# Altium PCB ESP32-PicoDK - new.PcbDoc
Units mil, origin at the board's own origin, x right, y up, seen from the top; angles counter-clockwise.
Board outline 2080 x 1506 mil, 2 copper layers (Top1, Bottom2), stack 40.202 mil thick; 47 components, 68 nets, 274 pads, 137 vias.
Unrouted connection lines stored in the file: 1.
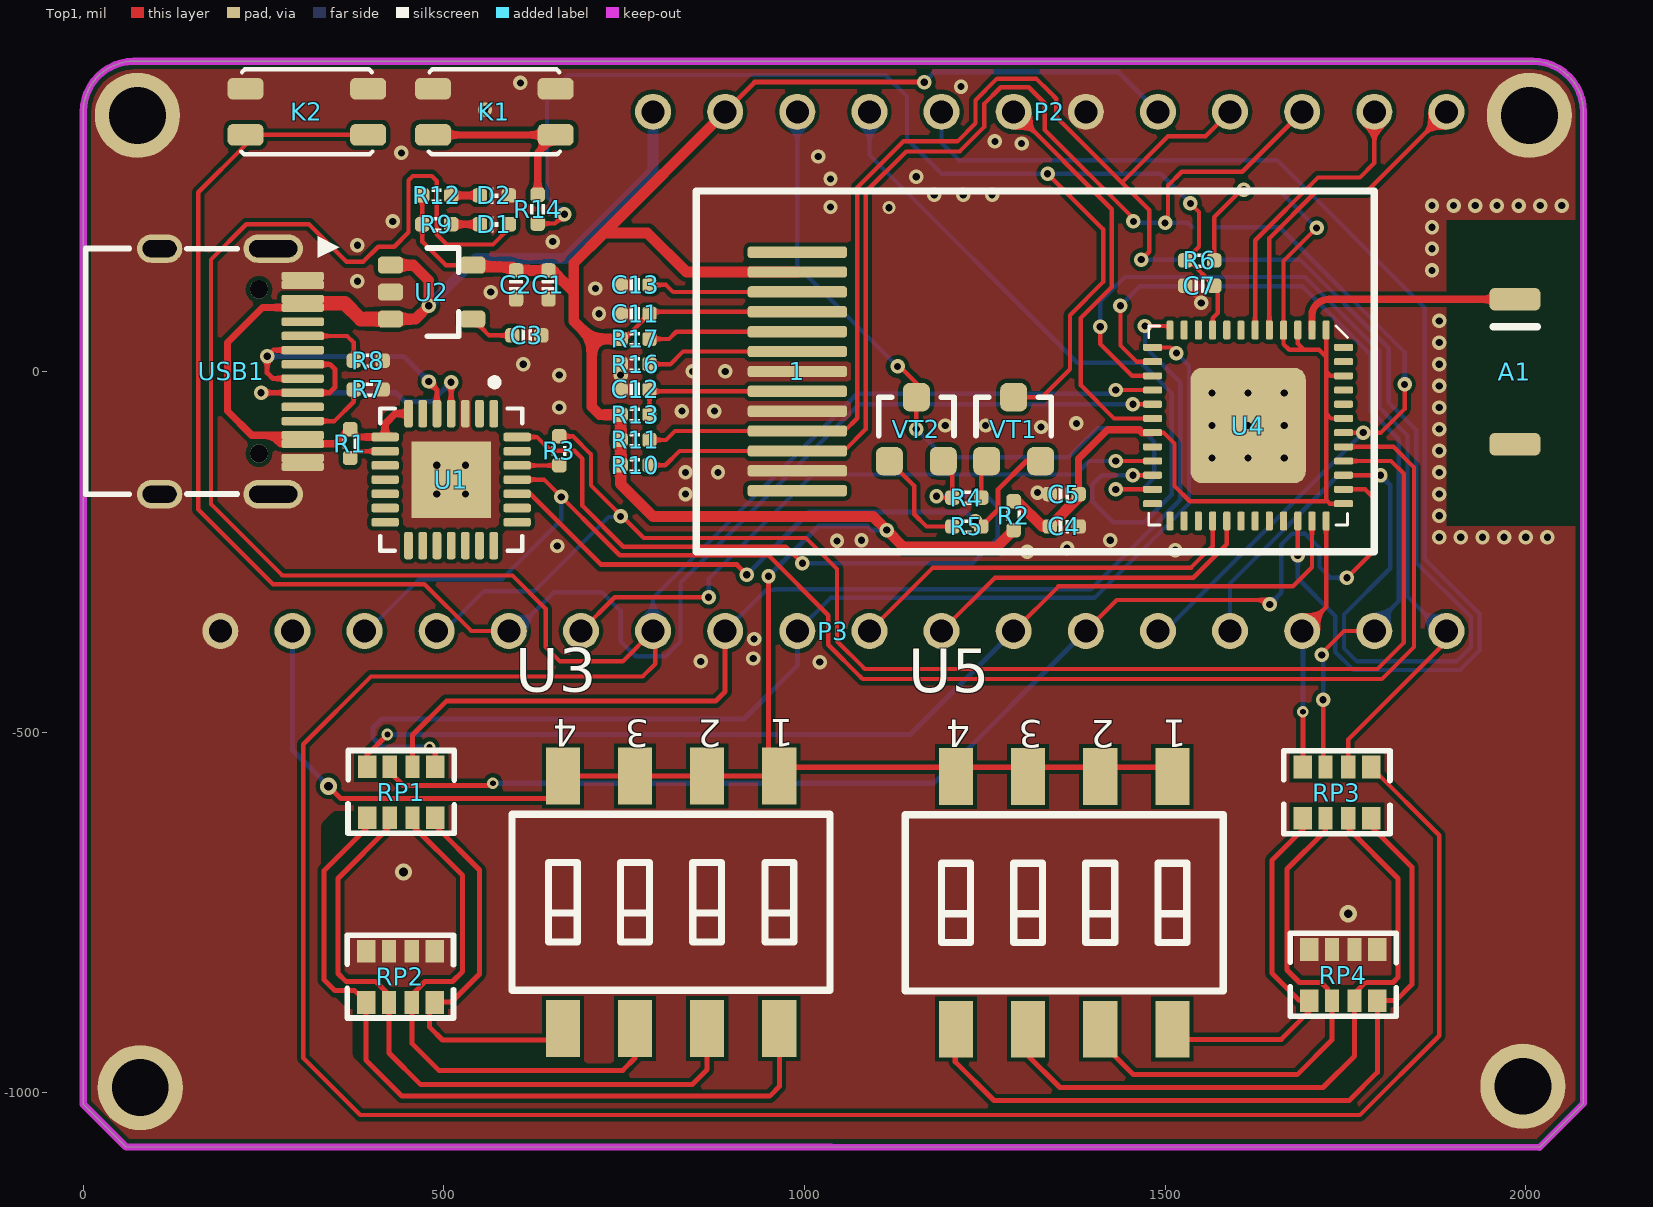
[diagram p0: Top1 view]
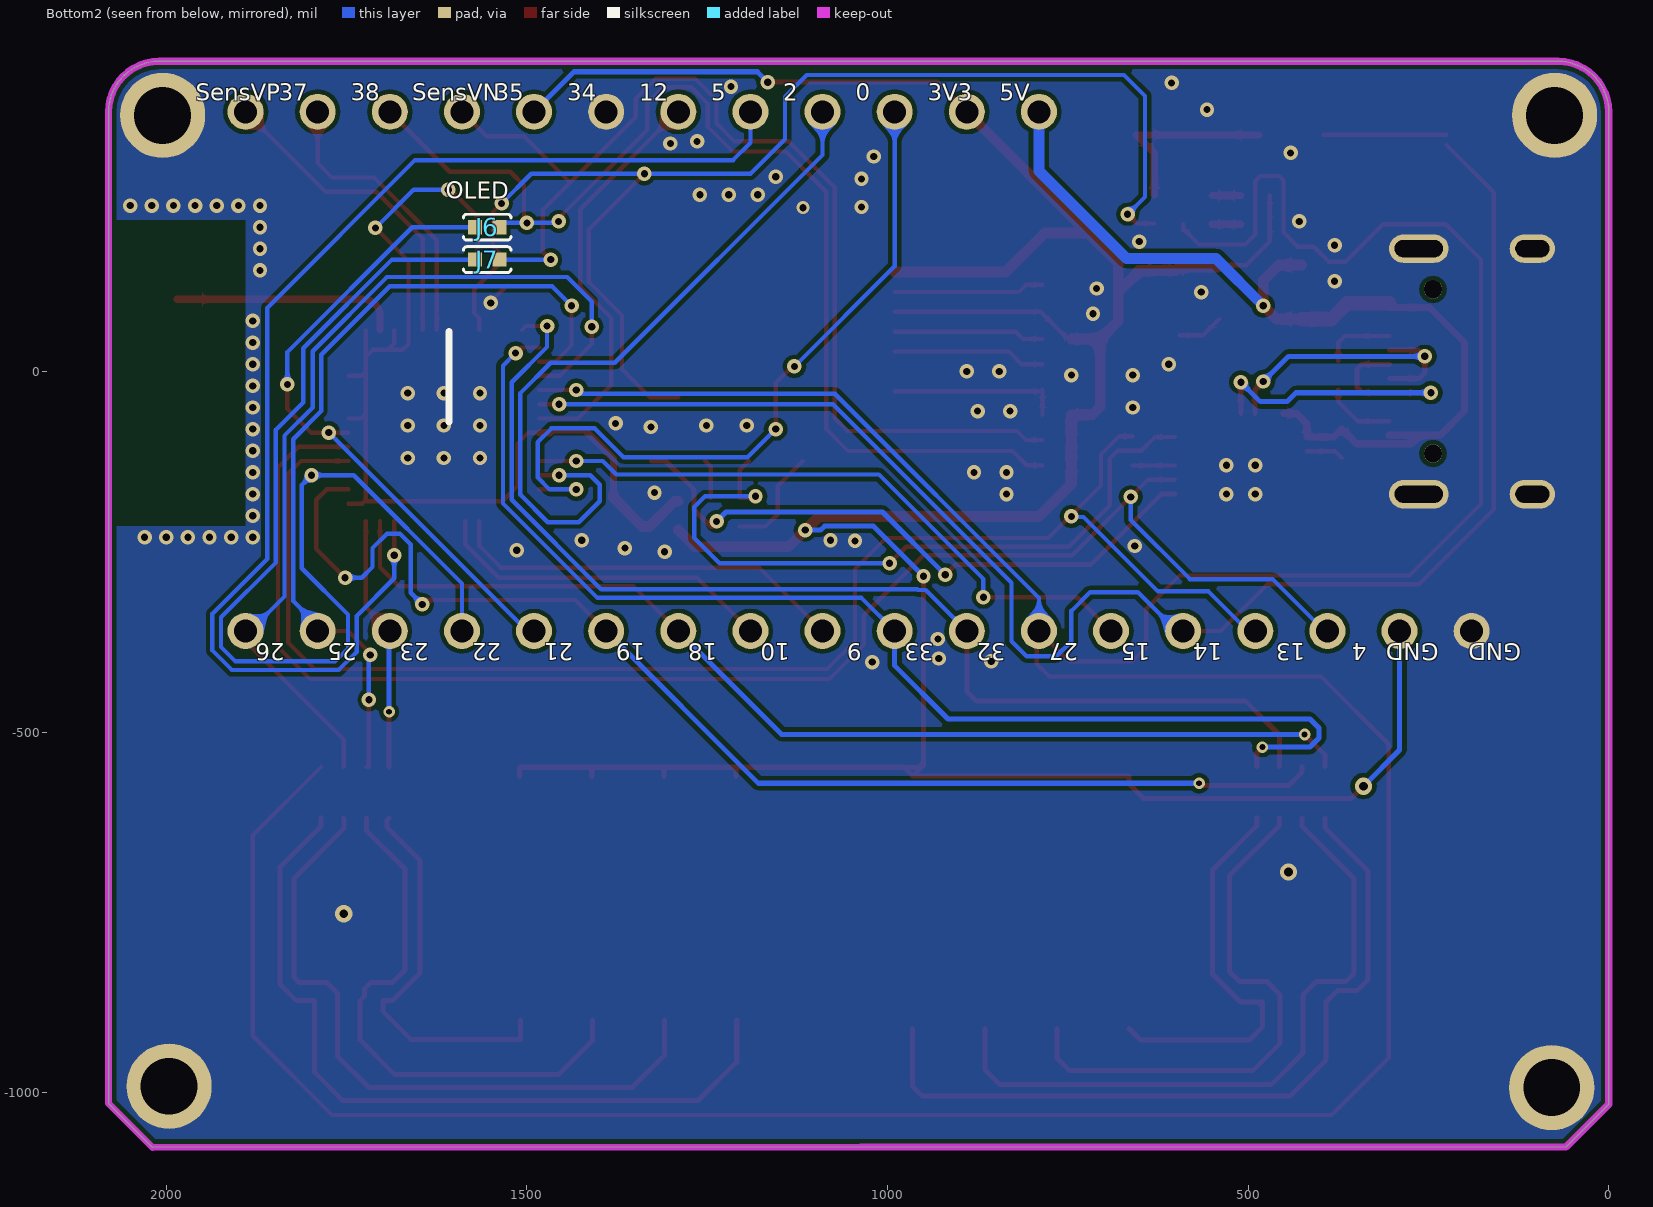
[diagram p1: Bottom2 view, seen from below]
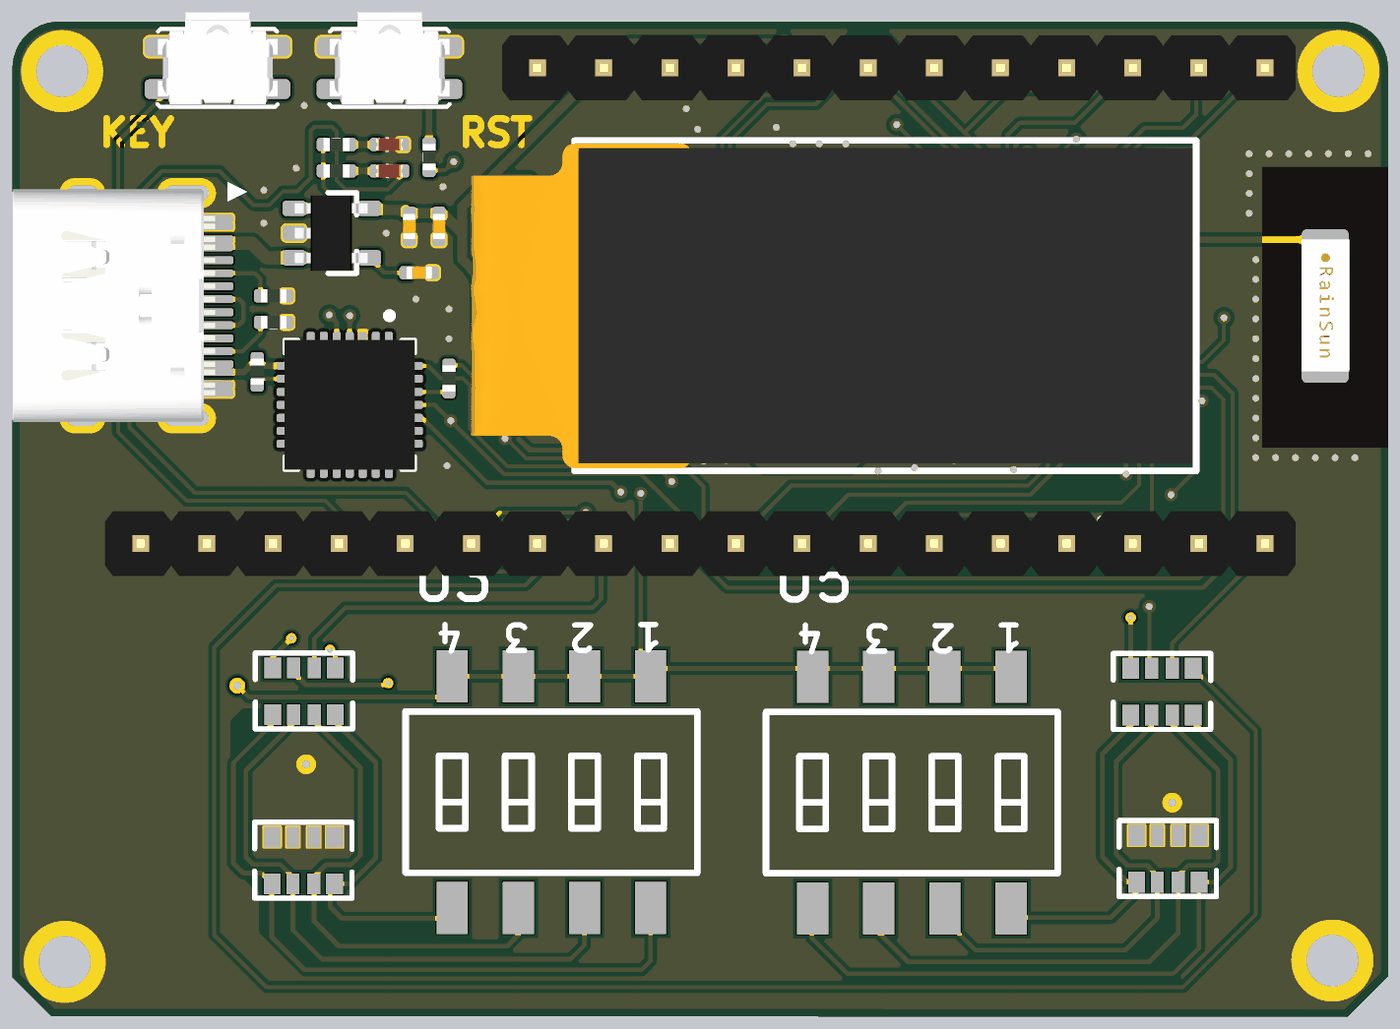
[diagram p2: 3D render of the assembled board from above, using the file's embedded part models]

## Layer stack, top to bottom
Top Solder: solder mask 0.4, Solder Resist, Dk 3.5
Top1: signal copper 1.4
Dielectric 1: core 37.4016, FR-4, Dk 4.2
Bottom2: signal copper 1.4
Bottom Solder: solder mask 0.4, Solder Resist, Dk 3.5

## Board outline
0,-1016 59,-1075 2019,-1076 2080,-1015 2080,360 ccw(c2010,360) 2010,430 70,430 ccw(c70,360) 0,360

## Design rules (kind name [scope] priority, off if disabled: settings)
Clearance [All] p1: gap=6 ignorepadtopadclearanceinfootprint=FALSE
ComponentClearance [All] p1: gap=0 collisioncheckmode=3 verticalgap=0 showdistances=FALSE
DiffPairsRouting [All] p1: maxlimit=9 minlimit=9 mostfreqgap=9 toplayer_minwidth=4 toplayer_maxwidth=4 toplayer_prefwidth=4 bottomlayer_minwidth=4 bottomlayer_maxwidth=4 bottomlayer_prefwidth=4 maxuncoupledlength=500
FanoutControl Fanout_BGA [All] p1: bgadir=Out bgaviamode=Centered fanoutstyle=Auto fanoutdirection=Alternating viagrid=1 // Fanout_BGA (Default Rule)
HoleSize [All] p1: absolutevalues=TRUE maxlimit=10000 minlimit=8 maxpercent=80.000 minpercent=20.000
MinimumSolderMaskSliver [All] p1 off: minsoldermaskwidth=2
PlaneClearance [All] p1: clearance=8
PlaneConnect [All] p1: planeconnectstyle=Direct reliefexpansion=20 reliefentries=4 reliefconductorwidth=10 reliefairgap=10
PolygonConnect [All] p1: connectstyle=Direct reliefconductorwidth=10 reliefentries=4 polygonreliefangle="90 Angle" airgapwidth=10
RoutingVias [All] p1: holewidth=8 width=16 viastyle="Through Hole" minholewidth=6 minwidth=12 maxholewidth=28 maxwidth=50
SilkToBoardRegionClearance [All] p1 off:
SilkToSilkClearance [All] p1: silktosilkclearance=0
SilkToSolderMaskClearance [IsPad] p1: minsilkscreentomaskgap=0 clearancetoexposedcopper=TRUE
SolderMaskExpansion [All] p1: expansion=3
Width [All] p1: maxlimit=10000 minlimit=6 preferedwidth=7
20 further rules are at their usual default settings.

## Components (designator, comment, footprint, x,y, rotation, side; value= is the part's Value field where it differs from the comment)
1 "OLED-12880" OLED-12880 990,0 r180 top locked
A1 "RAINSUN" ANT-Rainsun-AN5120 1985,0 r270 top
C1 "0.1uF" CAP_0402 645,120 r90 top value=0.1u
C2 "10uF" CAP_0402 600,120 r90 top value=0.1u
C3 "10nF" CAP_0402 615,50 r180 top value=0.1u
C4 "10uF" CAP_0402 1360,-215 r180 top value=0.1u
C5 "0.1uF" CAP_0402 1360,-170 r0 top value=0.1u
C7 "0.1uF" CAP_0402 1548,118.89 r180 top value=0.1u
C11 "10uF" CAP_0402 765,80 r0 top value=0.1u
C12 "10uF" CAP_0402 765,-25 r0 top value=0.1u
C13 "10uF" CAP_0402 765,120 r0 top value=0.1u
D1 "color?" LED_0402_RED 570,204 r0 top
D2 "color?" LED_0402_RED 570,244 r0 top
J6 "跳线" 0402-0R 1555,200 r0 bottom
J7 "跳线" 0402-0R 1555,155 r0 bottom
K1 "TACT 4P" ButtonTACT_3.5*3.55_90 570,360 r0 top value=3.4x3.5
K2 "TACT 4P" ButtonTACT_3.5*3.55_90 310,360 r0 top value=3.4x3.5
P2 "HDR1x12_2.54" HDR1X12_2.54_180 1890,360 r270 top locked
P3 "HDR1x18_2.54" HDR1X18_2.54_180 1890,-360 r270 top
R1 "10K" RES_0402 370,-100 r270 top value=22R
R2 "0R" RES_0402 1290,-200 r90 top value=22R
R3 "200R" RES_0402 660,-110 r270 top value=22R
R4 "12K" RES_0402 1225,-175 r0 top value=22R
R5 "12K" RES_0402 1225,-215 r180 top value=22R
R6 "10K" RES_0402 1548,153.89 r180 top value=22R
R7 "5.1K" RES_0402 395,-25 r0 top value=22R
R8 "5.1K" RES_0402 395,15 r0 top value=22R
R9 "1K" RES_0402 490,204 r0 top value=22R
R10 "10K" RES_0402 765,-130 r180 top value=22R
R11 "10K" RES_0402 765,-95 r180 top value=22R
R12 "1K" RES_0402 490,244 r0 top value=22R
R13 "10K" RES_0402 765,-60 r180 top value=22R
R14 "1K" RES_0402 630,225 r270 top value=22R
R16 "560K" RES_0402 765,10 r180 top value=22R
R17 "4.7K" RES_0402 765,45 r180 top value=22R
RP1 "4D03WGJ0102T5E" RES-ARRAY-SMD_0603-8P-L3.2-W1.6-BL 440.75,-583.43 r0 top
RP2 "YC164-JR-075K1L" RES-ARRAY-SMD_0603-8P-L3.2-W1.6-BL 439.75,-839.43 r0 top
RP3 "4D03WGJ0102T5E" RES-ARRAY-SMD_0603-8P-L3.2-W1.6-BL 1738.24,-584 r0 top
RP4 "YC164-JR-075K1L" RES-ARRAY-SMD_0603-8P-L3.2-W1.6-BL 1747,-837 r0 top
U1 "CP2102" QFN-28 510,-150 r270 top value=Value
U2 "LP2992 3V3" SOT23-5 485,110 r0 top
U3 "DM-04-V" SW-SMD_8P-L11.1-W6.2-P2.54-LS9.8 815,-736 r180 top
U4 "ESP32_SIP" QFN-48_7X7 1615,-75 r270 top
U5 "DM-04-V" SW-SMD_8P-L11.1-W6.2-P2.54-LS9.8 1360,-736.81 r180 top
USB1 "Type-C" Type-C-TOP 205,0 r180 top locked
VT1 "S8050" SMT_TRIODE_NPN 1290,-80 r0 top
VT2 "S8050" SMT_TRIODE_NPN 1155,-80 r0 top

## Footprints (in the part's own frame and the unit in brackets; to place one, negate y for a bottom-side part, rotate by r counter-clockwise, add the part's x,y. Pads: shape width x height; smd on the part's side, far side on the other; paste and mask are expansions set on the pad)
0402-0R [mm] "选择焊盘"
  rect 0.5x0.5 smd: 1(-0.432,0) 2(0.432,0)
  silkscreen extent -0.84,-0.46 0.84,0.46
ANT-Rainsun-AN5120 [mm] "选择焊盘"
  rrect50% 0.8x1.8 smd: 1(-2.54,0) ""(2.563,0)
  silkscreen extent -1.57,-0.76 -1.57,0.79, body extent -2.57,-0.91 2.54,0.94, height 1.32
ButtonTACT_3.5*3.55_90 [mil]
  rrect50% 50x30 smd: 1(-85,32) 2(-85,-32) 3(85,32) 4(85,-32)
  silkscreen extent -91,-59 91,59, body extent -90,-55 91,85, height 56
CAP_0402 [mil]
  rrect50% 20x20 smd: 1(-20,0) 2(20,0)
  silkscreen extent -7,-9 7,9, body extent -20,-10 20,10, height 20
HDR1X12_2.54_180 [mil]
  round 50 hole 32: 1(0,0) 2(0,-100) 3(0,-200) 4(0,-300) 5(0,-400) 6(0,-500) 7(0,-600) 8(0,-700) 9(0,-800) 10(0,-900) 11(0,-1000) 12(0,-1100)
  body extent -49,-1150 49,50, height 323
HDR1X18_2.54_180 [mil]
  round 50 hole 32: 1(0,0) 2(0,-100) 3(0,-200) 4(0,-300) 5(0,-400) 6(0,-500) 7(0,-600) 8(0,-700) 9(0,-800) 10(0,-900) 11(0,-1000) 12(0,-1100) 13(0,-1200) 14(0,-1300) 15(0,-1400) 16(0,-1500) 17(0,-1600) 18(0,-1700)
  body extent -49,-1750 49,50, height 323
LED_0402_RED [mil]
  rrect50% 20x20 smd: 1(-20,0) 2(20,0)
  silkscreen extent -6,-11 6,10, body extent -20,-10 20,10, height 18
OLED-12880 [mm]
  rrect50% 3.5x0.4 smd: 1(0,-4.2) 2(0,-3.5) 3(0,-2.8) 4(0,-2.1) 5(0,-1.4) 6(0,-0.7) 7(0,0) 8(0,0.7) 9(0,1.4) 10(0,2.1) 11(0,2.8) 12(0,3.5) 13(0,4.2)
  silkscreen extent -20.32,-6.35 3.56,6.35, body extent -20.18,-6.25 7.54,6.25, height 1.55
QFN-28 [mil]
  rrect50% 38x12 smd mask+5: 1(-91.5,59.05) 2(-91.5,39.37) 3(-91.5,19.68) 4(-91.5,0) 5(-91.5,-19.69) 6(-91.5,-39.37) 7(-91.5,-59.06) 15(91.5,-59.06) 16(91.5,-39.37) 17(91.5,-19.69) 18(91.5,0) 19(91.5,19.68) 20(91.5,39.37) 21(91.5,59.05)
  rrect50% 12x38 smd mask+5: 8(-59.06,-91.5) 9(-39.37,-91.5) 10(-19.69,-91.5) 11(0,-91.5) 12(19.68,-91.5) 13(39.37,-91.5) 14(59.05,-91.5) 22(59.05,91.5) 23(39.37,91.5) 24(19.68,91.5) 25(0,91.5) 26(-19.69,91.5) 27(-39.37,91.5) 28(-59.06,91.5)
  rect 106.3x110.24 smd: 29(0,0)
  silkscreen extent -140,-98 99,99, body extent -99,-99 98,98, height 35
QFN-48_7X7 [mm]
  rrect50% 0.675x0.25 smd: 1(-3.362,2.75) 2(-3.362,2.25) 3(-3.362,1.75) 4(-3.362,1.25) 5(-3.362,0.75) 6(-3.362,0.25) 7(-3.362,-0.25) 8(-3.362,-0.75) 9(-3.362,-1.25) 10(-3.362,-1.75) 11(-3.362,-2.25) 12(-3.362,-2.75) 25(3.363,-2.75) 26(3.363,-2.25) 27(3.363,-1.75) 28(3.363,-1.25) 29(3.363,-0.75) 30(3.363,-0.25) 31(3.363,0.25) 32(3.363,0.75) 33(3.363,1.25) 34(3.363,1.75) 35(3.363,2.25) 36(3.363,2.75)
  rrect50% 0.25x0.675 smd: 13(-2.75,-3.362) 14(-2.25,-3.362) 15(-1.75,-3.362) 16(-1.25,-3.362) 17(-0.75,-3.362) 18(-0.25,-3.362) 19(0.25,-3.362) 20(0.75,-3.362) 21(1.25,-3.362) 22(1.75,-3.362) 23(2.25,-3.362) 24(2.75,-3.362) 37(2.75,3.363) 38(2.25,3.363) 39(1.75,3.363) 40(1.25,3.363) 41(0.75,3.363) 42(0.25,3.363) 43(-0.25,3.363) 44(-0.75,3.363) 45(-1.25,3.363) 46(-1.75,3.363) 47(-2.25,3.363) 48(-2.75,3.363)
  rrect20% 4.064x4.064 smd: 49(0,0)
  silkscreen extent -3.5,-3.5 3.5,3.5, body extent -3.5,-3.5 3.5,3.5, height 1
RES-ARRAY-SMD_0603-8P-L3.2-W1.6-BL [mm]
  rect 0.65x0.8 smd paste+0 mask+0.051: 1(-1.2,-0.9) 4(1.2,-0.9) 5(1.2,0.9) 8(-1.2,0.9)
  rect 0.5x0.8 smd paste+0 mask+0.051: 2(-0.4,-0.9) 3(0.4,-0.9) 6(0.4,0.9) 7(-0.4,0.9)
  silkscreen extent -1.87,-1.45 1.87,1.47
RES_0402 [mil]
  rrect50% 20x20 smd: 1(-20,0) 2(20,0)
  silkscreen extent -7,-10 7,10, body extent -20,-10 20,10, height 14
SMT_TRIODE_NPN [mm] "Surface mount NPN transistor, package SOT-23"
  rrect50% 0.95x1 smd: 1(-0.95,-1.125) 2(0.95,-1.125) 3(0,1.125)
  silkscreen extent -1.33,-0.23 1.32,1.12, body extent -1.45,-1.4 1.45,1.4, height 1.3
SOT23-5 [mm] "SOT23, 3-Leads, Body 3.1x3.0mm (max), Pitch 0.95mm, IPC Medium Density"
  rrect50% 0.889x0.6 smd: 1(-1.5,0.95) 2(-1.5,0) 3(-1.5,-0.95) 4(1.396,-0.95) 5(1.396,0.95)
  silkscreen extent -0.2,-1.55 0.9,1.55, body extent -1.48,-1.45 1.32,1.45, height 1.2
SW-SMD_8P-L11.1-W6.2-P2.54-LS9.8 [mm]
  rect 1.2x2 smd paste+0 mask+0.051: 1(-3.81,-4.45) 2(-1.27,-4.45) 3(1.27,-4.45) 4(3.81,-4.45) 5(3.81,4.45) 6(1.27,4.45) 7(-1.27,4.45) 8(-3.81,4.45)
  silkscreen extent -5.6,-3.1 5.6,3.1
Type-C-TOP [mm]
  round 0.65 hole 0.65: 0(-0.98,2.89) 0(-0.98,-2.89)
  oval 1.6x1 hole 0.6 slot 1.2 at 0 deg: 1(2.52,4.325) 2(2.52,-4.325)
  oval 2.1x1 hole 0.6 slot 1.7 at 0 deg: 3(-1.48,-4.325) 4(-1.48,4.325)
  rrect50% 1.5x0.3 smd: A1(-2.52,-3.35) A4(-2.52,-2.55) A5(-2.52,-1.25) A6(-2.52,-0.25) A7(-2.52,0.25) A8(-2.52,1.25) A9(-2.52,2.55) A12(-2.52,3.35) B1(-2.52,3.05) B4(-2.52,2.25) B5(-2.52,1.75) B6(-2.52,0.75) B7(-2.52,-0.75) B8(-2.52,-1.75) B9(-2.52,-2.25) B12(-2.52,-3.05)
  silkscreen extent -0.22,-4.32 5.12,4.32, body extent -2.57,-4.48 5.18,4.48, height 3.26

## Part data
A1: library part ANT-Rainsun-AP5120
C1 C2 C3 C4 C5 C7 C11 C12 C13: library part 电容-0402, "Capacitor"
D1 D2: library part LED_0402, "LED", Type=0402
J6 J7: "Resistor", LatestRevisionDate=17-Jul-2002, LatestRevisionNote="Re-released for DXP Platform.", PackageDescription="Axial Device, Thru-Hole; 2 Leads; 0.4 in Pin Spacing", PackageReference=AXIAL-0.4, Published=8-Jun-2000, Publisher="Altium Limited"
K1 K2: library part ButtonTACT, "Button", Type="TACT 4P"
P2 P3: "Header"
R1 R2 R3 R4 R5 R6 R7 R8 R9 R10 R11 R12 R13 R14 R16 R17: library part 电阻-0402, "Resistor"
RP1 RP2 RP3 RP4: library part RP
U1: "USBתTTL", MFG #1="SILICON LABS", PART DESC="SINGLE-CHIP USB TO UART BRIDGE, QFN28, RoHS.", PART NUMBER=CP2102, RefDes=RefDes, Type=DEV
U2: library part LP2992, "LDO"
U3 U5: library part "SW DIP-4", "DIP Switch, 4 Position, SPST", Code_IPC=SOIC127P600-8, Code_JEDEC=MS-012-AA, LatestRevisionDate=29-May-2009, LatestRevisionNote="IPC-7351 Footprint Added.", PackageDescription="8-Pin Small Outline Integrated Circuit 1.27 mm Pitch", PackageReference=SO8, PackageVersion=Dec-2002, Published=24-Mar-1999, Publisher="Altium Limited"
U4: library part ESP32-PICO
USB1: library part USB-Type-C-TOP
VT1 VT2: library part SMT_TRIODE_NPN, "Surface mount NPN transistor, package SOT-23"

## Free pads (board coordinates)
  round 118.11 hole 78.74: ""(75,355) ""(79,-993) ""(1996,-991) ""(2005,355)

## Via types
v1: diameter 20, hole 10, Top1 to Bottom2, tented both sides, 129 vias
v2: diameter 16, hole 8, Top1 to Bottom2, 4 vias
v3: diameter 24, hole 12, Top1 to Bottom2, 3 vias
v4: diameter 18, hole 10, Top1 to Bottom2, tented both sides, 1 vias

## Nets (pads, with @x,y where several pads share a name; then routed paths per layer and width w, separated by ;. In a path a pad name is that pad's centre, name@x,y a point inside that pad or via, vN(x,y) a via of type N, cw(c..) or ccw(c..) an arc to the next point about the centre after c; other vN are vias at no path point)
3V3A: C4.2 C5.2 R2.2 R6.1 U4.1 U4.3 U4.4 U4.19 U4.37 U4.43 U4.46 | length 1444.1
  Top1 w6: U4.19 1497.84,-84.84 1513,-100 1513,-159 1534,-180 1721.53,-180 1723.27,-178.27 ; R6.1 1568,214 1606,252 v1(1609,252) ; U4.3 1683.9,38.74 1692.63,30 ; v1(1710,199) 1664.21,153.21 U4.4 1664.21,37.79 1672,30 1692.63,30 ; U4.1 1723.27,20 ; U4.37 1728.27,-183.27 1723.27,-178.27 ; U4.43 1730.16,-65.16 1723.27,-58.27 ; U4.46 1729.1,-6.1 1723.27,-0.27 ; 1692.63,30 1713.27,30 1723.27,20 ; 1723.27,-178.27 1723.27,-58.27 ; 1723.27,-58.27 1723.27,-0.27 ; 1723.27,-0.27 1723.27,20
  Top1 w7: C4.2@1335,-215 C4.2
  Top1 w10: C5.2 1380,-121 1420,-81 1464,-81 1468,-85 1482.46,-85 U4.19
  Top1 w15: R2.2 1295,-180 1330,-215 C4.2@1335,-215 ; C4.2 1380,-175 C5.2
  Bottom2 w6: v1(1609,252) 1657,252 v1(1710,199)
CP_Rx: P3.16 U1.25 U4.41 | length 2127.6
  Top1 w6: U1.25 638.68,-150 743.68,-255 950,-255 1033,-338 1033,-379 1077.5,-423.5 1077.5,-423.87 1077.87,-423.87 1080.5,-426.5 1800.5,-426.5 1845,-382 1845,-133 1816.53,-104.53 U4.41
  Bottom2 w6: P3.16 394,-360 466,-288 580.73,-288 662.68,-206.06 v1(662.68,-174)
CP_Tx: P3.15 R3.1 U4.40 | length 2049.3
  Top1 w6: R3.1 679,-90 704,-115 704,-158 777,-231 1002,-231 1045,-274 1045,-374.03 1080.98,-410.01 1083.47,-412.5 1794.5,-412.5 1831,-376 1831,-142 1813.21,-124.21 U4.40
  Bottom2 w6: P3.15 491.55,-358.45 501.55,-358.45 555,-305 625,-305 728.13,-201.87 744.13,-201.87 v1(745,-201)
DTR: R4.1 U1.28 VT2.2 | length 1004.8
  Top1 w6: U1.28 628.94,-90.94 648,-110 681,-110 692,-121 692,-186.35 748.65,-243 974,-243 v1(997,-266) ; v1(1183,-173) 1185,-175 R4.1 1205,-136.89 VT2.2
  Bottom2 w6: v1(997,-266) 1233,-266 1268,-231 1268,-188 1253,-173 v1(1183,-173)
EN: C7.1 R6.2 R14.2 U4.9 VT1.3 | length 1857.6
  Top1 w6: R14.2 654,205 v1(667,218) ; VT1.3 1329.29,-35.71 1368,3 1368,78 1414,124 1414,197 v1(1337,274) ; v1(1535,233) 1547,221 1547,172.89 R6.2 1533,153.89 C7.1 1573,113.89 1573,81 1565.79,73.79 U4.9
  Bottom2 w6: v1(667,218) 643,242 643,382 672,411 1112,411 1142,381 1142,322 1190,274 v1(1337,274) 1494,274 v1(1535,233)
FLASH_CLK: U4.31
FLASH_CS: U4.25
FLASH_SD0: U4.27
FLASH_SD1: U4.33
FLASH_SD2: U4.30
FLASH_SD3: U4.32
GND: 1.7 1.9 1.12 C1.1 C2.1 C3.1 C4.1 C5.1 C7.2 C11.1 C12.1 C13.1 D2.2 K1.1 K1.3 K2.1 K2.3 P2.6 P3.18 pad. R7.2 R8.2 R16.2 RP2.5 RP2.6 RP2.7 RP2.8 RP4.5 RP4.6 RP4.7 RP4.8 U1.3 U1.29 U2.2 U4.49 USB1.1 USB1.2 USB1.3 USB1.4 USB1.A1 USB1.A12 USB1.B1 USB1.B12 | length 33
  Top1 w6: C7.2 1550,96.89 v1(1550,95)
  other v1: 1021,-403 856,-402 929,-398 930,-371 1309,-250 1514,-248 1364,-245 657,-242 1045,-235 1079,-234 1424,-234 1880,-230 1910,-230 1940,-230 1970,-230 2000,-230 2030,-230 1880,-200 490,-170 530,-170 835,-170 1880,-170 1323,-168 835,-140 880,-140 1880,-140 490,-130 530,-130 1565,-120 1615,-120 1665,-120 1880,-110 1880,-80 1328,-77 1195,-75 1251,-75 1565,-75 1615,-75 1665,-75 1377,-72 830,-55 875,-55 660,-50 1880,-50 1565,-30 1615,-30 1665,-30 1880,-20 660,-5 745,-5 845,0 890,0 610,10 1880,10 1880,40 1880,70 715,80 565,110 710,115 380,125 1870,140 1870,170 380,175 651,180 1870,200 429,208 1036,228 1870,230 1900,230 1930,230 1960,230 1990,230 2020,230 2050,230 1180,245 1220,245 1260,245 1036,267 1155,270 1019,298 441,303 1301,316 1264,319 557,363 1217,395 606,400
  other v3: 1753.75,-752 444,-694
  other v4: 1117,227
GPIO0: P2.10 U4.23 VT2.3 | length 1041.3
  Top1 w6: v1(1129,7) 1132,7 1155,-16 VT2.3 v1(1155,-80) ; v1(1431.42,-163.58) U4.23
  Bottom2 w6: P2.10 990,146 v1(1129,7) ; v1(1155,-80) 1194,-119 1366,-119 1406,-79 1466,-79 1485,-98 1485,-147 1468.42,-163.58 v1(1431.42,-163.58)
GPIO2: P2.9 U4.22 | length 1006.5
  Top1 w6: v1(1455.27,-143.9) U4.22
  Bottom2 w6: P2.9 1090,300 1378,12 1466.97,12 1509,-30.03 1509,-171 1471,-209 1428,-209 1399,-180 1399,-157 1412.1,-143.9 v1(1455.27,-143.9)
GPIO4: U4.24
GPIO5: P2.8 U4.34 | length 1739
  Top1 w6: v1(1683.9,-254.9) U4.34
  Bottom2 w6: P2.8 1190,317 1214,293 1655,293 1860,88 1860,-260 1936,-336 1936,-386.97 1908.97,-414 1761.03,-414 1736,-388.97 1736,-339 1683.9,-286.9 v1(1683.9,-254.9)
GPIO9: P3.9 U4.28 | length 559.4
  Top1 w6: P3.9 1178,-272 1536.03,-272 1565.79,-242.24 U4.28
GPIO10: P3.8 U4.29 | length 477.5
  Top1 w6: P3.8 1264,-286 1539,-286 1585.47,-239.53 U4.29
GPIO12: P2.7 U4.18 | length 572.5
  Top1 w6: P2.7 1291,360 1426,225 1426,117 1383,74 1383,-19 1429.16,-65.16 U4.18
GPIO13: U4.20
GPIO14: K2.2 K2.4 P3.14 U4.17 | length 2371.7
  Top1 w6: K2.2@225,314 159.48,248.48 159.48,-191.48 263,-295 473.09,-295 538.08,-360 P3.14 ; K2.2 K2.4 ; v1(1455.27,-45.47) U4.17
  Bottom2 w6: P3.14 599,-360 653,-306 718.97,-306 745,-332.03 745,-374 766,-395 807.06,-395 828,-374.06 828,-292.94 1075.47,-45.47 v1(1455.27,-45.47)
GPIO15: P3.13 U4.21 | length 905
  Top1 w6: P3.13 737,-313 v1(867,-313) ; v1(1431.42,-124.21) U4.21
  Bottom2 w6: v1(867,-313) 867,-287.88 1011.88,-143 1375.94,-143 1394.73,-124.21 v1(1431.42,-124.21)
GPIO18: P3.7 RP1.8 U4.35 | length 1498.3
  Top1 w6: P3.7 1352,-298 1677,-298 1703.58,-271.42 U4.35
  Top1 w7: RP1.8 393.51,-531.5 v2(421.63,-503.38)
  Bottom2 w7: v2(421.63,-503.38) 1146.62,-503.38 P3.7
GPIO19: P3.6 RP1.7 U4.38 | length 1746.6
  Top1 w6: P3.6 1433,-317 1639,-317 v1(1645,-323) ; U4.38 1777.58,-163.58 1792,-178 1792,-246 v1(1752,-286)
  Top1 w7: RP1.7 425,-555.53 443.47,-574 565,-574 v2(568,-571)
  Bottom2 w6: v1(1645,-323) 1661,-307 1661,-239.97 1675.97,-225 1694,-225 1714,-245 1714,-271 1729,-286 v1(1752,-286)
  Bottom2 w7: v2(568,-571) 1151.24,-571 1179,-571 P3.6
GPIO21: J6.2 P3.5 U4.42 | length 907.6
  Top1 w6: U4.42 v1(1774.73,-84.84) 1799.16,-84.84 1832,-52 v1(1832,-18)
  Bottom2 w6: P3.5 1499.58,-360 v1(1774.73,-84.84) ; J6.2 1659,200 1832,27 v1(1832,-18)
GPIO22: J7.2 P3.4 U4.39 | length 1602.1
  Top1 w6: U4.39 v1(1798.58,-143.9)
  Bottom2 w6: J7.2 1687.03,155 1810,32.03 1810,-43 1848,-81 1848,-264.97 1924,-340.97 1924,-382 1904,-402 1766,-402 1748,-384 1748,-337 1812,-273 1812,-157.35 v1@1798.58,-143.93 ; P3.4 1590,-294 1740.1,-143.9 v1(1798.58,-143.9)
GPIO23: P3.3 RP3.8 U4.36 | length 355.4
  Top1 w6: P3.3 1723.27,-326.73 U4.36
  Top1 w7: RP3.8 v2(1691,-472)
  Bottom2 w7: P3.3 1691,-361 v2(1691,-472)
GPIO25: P3.2 RP3.7 U4.14 | length 1166.9
  Top1 w6: v1(1438,91) 1438,35.91 1460.33,13.58 U4.14 ; v1@1715.98,-391.98 1747.97,-360 P3.2 ; v1(1719,-455.31) 1719,-548.56 RP3.7
  Bottom2 w6: v1(1438,91) 1465,118 1690.09,118 1785,23.09 1785,-54.97 1824,-93.97 1824,-318.33 1790,-352.33 P3.2 ; v1(1717,-393) 1719,-395 v1(1719,-455.31)
GPIO26: P3.1 RP3.6 U4.15 | length 1268.7
  Top1 w6: v1(1410.03,62.03) 1410,38 1454.1,-6.1 U4.15 ; RP3.6@1753.75,-548.56 1753.75,-510.25 1890,-374 P3.1
  Bottom2 w6: v1(1410.03,62.03) 1410,97 1444,131 1694.06,131 1797,28.06 1797,-50 1836,-89 1836,-312 1884,-360 P3.1
GPIO27: D1.2 P3.12 RP3.5 U4.16 | length 5673.7
  Top1 w6: D1.2 590,198 568,176 504,176 490,190 490,264 483,271 457,271 451,265 451,193 431,173 409,173 388,152 365,152 313,204 226,204 177,155 177,-184 276,-283 595,-283 641,-329 641,-382 661,-402 748,-402 P3.12 793,-363 793,-405.48 775.48,-423 399,-423 305,-517 305,-952 384,-1031 1770,-1031 1880,-921 1880,-643.08 RP3.5 ; v1(1431.42,-25.79) U4.16
  Bottom2 w6: P3.12 790,-313.97 1072.97,-31 1426.2,-31 v1(1431.42,-25.79)
GPIO32: P3.11 RP1.6 U4.12 | length 1591
  Top1 w6: v1(1472,63) 1501.11,63 U4.12
  Top1 w7: RP1.6 456.5,-504.01 503.37,-457.13 876.63,-457.13 890,-443.76 P3.11
  Bottom2 w6: P3.11 947,-303 957.87,-303 958.87,-302 1397.03,-302 1521,-178.03 1521,-15.03 1472,33.97 v1(1472,63)
GPIO33: P3.10 RP1.5 U4.13 | length 1668.4
  Top1 w6: U4.13 1507.73,33.27 v1(1515.58,25.42)
  Top1 w7: v2(480.13,-520.88) 487.99,-528.74 RP1.5
  Bottom2 w6: P3.10 1036,-314 1402,-314 1533,-183 1533,8 v1(1515.58,25.42)
  Bottom2 w7: v2(480.13,-520.88) 414.13,-520.88 401.63,-508.38 401.63,-494.38 414.13,-481.88 916.13,-481.88 990,-408.01 P3.10
GPIO34: U4.10
GPIO35: U4.11
GPIO37: P2.2 U4.6 | length 405
  Top1 w6: U4.6 1624.84,181.87 1711.97,269 1770,269 1790,289 P2.2
GPIO38: U4.7 | length 0.2
  Top1 w6: U4.7@1605,57.54 U4.7
Net1_3: 1.3 C13.2 | length 209
  Top1 w6: C13.2 808,120 817.76,110.24 1.3
Net1_5: 1.5 R17.1 | length 209.2
  Top1 w6: R17.1 812,45 822.12,55.12 1.5
Net1_6: 1.6 R16.1 | length 212.3
  Top1 w6: R16.1 814,10 831.56,27.56 1.6
Net1_8: 1.8 C12.2 R13.1 | length 241.1
  Top1 w6: R13.1 C12.2 787.56,-27.56 1.8
NetA1_1: A1.1 U4.2 | length 422.5
  Top1 w10: U4.2 1703.58,78.09 ; A1.1 1727.66,100 ; 1703.58,78.09 cw(c1723.96,78.09) 1709.55,92.5 ; 1703.58,78.09 cw(c1723.96,78.09) 1709.55,92.5 ; 1703.58,78.09 cw(c1723.96,78.09) 1709.55,92.5 ; 1703.58,78.09 cw(c1723.96,78.09) 1709.55,92.5 ; 1709.55,92.5 cw(c1727.66,74.39) 1727.66,100 ; 1709.55,92.5 cw(c1727.66,74.39) 1727.66,100 ; 1709.55,92.5 cw(c1727.66,74.39) 1727.66,100 ; 1709.55,92.5 cw(c1727.66,74.39) 1727.66,100
NetC3_2: C3.2 U2.4 | length 64.4
  Top1 w6: U2.4 562.54,50 C3.2
NetD1_1: D1.1 R9.2 | length 40
  Top1 w10: R9.2 D1.1
NetD2_1: D2.1 R12.2 | length 40
  Top1 w10: R12.2 D2.1
NetK1_2: K1.2 K1.4 R14.1 | length 263.4
  Top1 w10: K1.2 K1.4 630,303 R14.1
NetR1_2: R1.2 U1.9 | length 52.4
  Top1 w6: R1.2 379.37,-110.63 U1.9
NetR3_2: R3.2 U1.26 | length 58.2
  Top1 w6: U1.26 R3.2@659.68,-130.31
NetR4_2: R4.2 VT1.1 | length 53.9
  Top1 w6: R4.2 1245,-131.89 VT1.1
NetR5_2: R5.2 VT2.1 | length 148
  Top1 w6: VT2.1 1152,-158.69 1152,-198 1169,-215 R5.2
NetR7_1: R7.1 USB1.B5 | length 98.9
  Top1 w6: USB1.B5 348.1,-68.9 375,-42 R7.1
NetR8_1: R8.1 USB1.A5 | length 99.6
  Top1 w6: USB1.A5 365.79,49.21 375,40 R8.1
NetRP1_1: RP1.1 RP2.1 U3.8 | length 1080.3
  Top1 w7: RP1.1 393.51,-632.49 334,-692 334,-843.67 348.95,-858.61 376.24,-858.61 392,-874.37 392,-955 441.88,-1004.88 951.63,-1004.88 965,-991.51 U3.8
NetRP1_2: RP1.2 RP2.2 U3.7 | length 934.2
  Top1 w7: RP1.2 425,-631 353,-703 353,-834.67 363.95,-845.61 405.23,-845.61 424,-864.38 RP2.2 424,-945 468,-989 843.88,-989 865,-967.88 U3.7
NetRP1_3: RP1.3 RP2.3 U3.6 | length 765.4
  Top1 w7: RP1.3 456.5,-629.5 526,-699 526,-832 512,-846 473.88,-846 456,-863.88 456,-932 493,-969 748,-969 765,-952 U3.6
NetRP1_4: RP1.4 RP2.4 U3.5 | length 594.1
  Top1 w7: RP2.4@480.24,-874.44 480.24,-909.24 ; RP1.4 487.99,-629.99 549.37,-691.37 549.37,-835.63 510.56,-874.44 482.91,-874.44 482.91,-877.1 480.24,-879.77 480.24,-909.24 ; U3.5 649.19,-927 498,-927 480.24,-909.24
NetRP3_1: RP3.1 RP4.1 U5.8 | length 550.7
  Top1 w7: U5.8@1509,-899.19 1509,-926 1661,-926 1699.76,-887.24 RP4.1 1686.43,-872.43 1648,-834 1648,-678 1693.62,-632.38 1693.62,-622.06 RP3.1
NetRP3_2: RP3.2 RP4.2 U5.7 | length 763.5
  Top1 w7: U5.7@1409,-899.19 1409,-928 1456,-975 1683,-975 1731.25,-926.75 RP4.2 1724.91,-866.09 1724.91,-855.6 1716.49,-847.19 1686.19,-847.19 1669,-830 1669,-690 1722.25,-636.75 1722.25,-619.67 RP3.2
NetRP3_3: RP3.3 RP4.3 U5.6 | length 945.2
  Top1 w7: U5.6@1309,-899.19 1309,-947.88 1354.12,-993 1719,-993 1762.75,-949.25 RP4.3 1762.75,-861.95 1777.51,-847.19 1815.81,-847.19 1823,-840 1823,-703 1753.75,-633.75 1753.75,-619.67 RP3.3
NetRP3_4: RP3.4 RP4.4 U5.5 | length 1092.2
  Top1 w7: U5.5@1209,-899.19 1209,-957.25 1262.75,-1011 1755.12,-1011 1794.24,-971.88 RP4.4 1819.56,-872.43 1842,-850 1842,-687 1785.48,-630.48 RP3.4
OLED_SCL: 1.10 J7.1 P2.4 R11.1 | length 1532
  Top1 w6: R11.1 808,-95 820.33,-82.67 1.10 1055.33,-82.67 1073,-65 1073,255 1137,319 1212.03,319 1237,343.97 1237,375.97 1267.03,406 1321.14,406 1340.17,386.97 1349,378.14 1349,352.92 1478,223.92 1478,166 v1(1467,155) ; 1440,261.92 1504.08,326 1556,326 P2.4
  Bottom2 w6: v1(1467,155) J7.1
OLED_SDA: 1.11 J6.1 P2.3 R10.1 | length 1564
  Top1 w6: R10.1 807,-130 826.77,-110.23 1.11 1054.77,-110.23 1085,-80 1085,249 1141,305 1215,305 1249,339 1249,371 1272,394 1311,394 1333.14,371.86 1333.14,334.86 v1@1458.87,209.13 ; v1(1500,206) 1500,207.19 1504,211.19 1504,258 1523,277 1607,277 P2.3
  Bottom2 w6: v1@1459.38,206.37 1459.38,206 1532,206 J6.1
  other v1: 1456,208
RTS: R5.1 U1.24 VT1.2 | length 874.3
  Top1 w7: U1.24 619.68,-169.68 718,-268 906,-268 v1(920,-282) ; v1(1237,-208) 1237.88,-208.88 1237.88,-215 R5.1 1268,-192 1268,-164 1307.71,-124.29 VT1.2
  Bottom2 w7: v1(920,-282) 1007,-195 1224,-195 v1(1237,-208)
SENSOR_VN: U4.8
SENSOR_VP: P2.1 U4.5 | length 445.3
  Top1 w6: U4.5 1644.53,184.59 1708.94,249 1779,249 P2.1
USB-PWR-DM: U1.5 USB1.A7 USB1.B7 | length 415.9
  Top1 w7: USB1.A7 262.84,-9.84 255,-2 v1(255,21) 263.53,29.53 USB1.B7 ; v1(479,-14) 490.31,-25.31 U1.5
  Bottom2 w7: v1(255,21) 444,21 v1(479,-14)
USB-PWR-DP: U1.4 USB1.A6 USB1.B6 | length 501.5
  Top1 w7: v1(246.53,-29.53) USB1.B6 341.47,-29.53 349,-22 349,3 342.16,9.84 USB1.A6 ; U1.4 v1(510,-15)
  Bottom2 w7: v1(246.53,-29.53) 433.53,-29.53 445.91,-41.91 483.09,-41.91 v1(510,-15)
VBUS: P2.12 R1.1 U1.7 U1.8 U2.1 U2.3 USB1.A4 USB1.A9 USB1.B4 USB1.B9 | length 1339.2
  Top1 w7: USB1.B9 304.21,94.58 USB1.A4
  Top1 w10: USB1.B4 262,-88.58 ; USB1.B9 248.58,88.58 200,40 200,-55 233.58,-88.58 262,-88.58 ; U1.7 432.5,-58.5 418.5,-72.5 U1.8 380.94,-90.94 R1.1 349.61,-100.39 USB1.A9 273.81,-100.39 262,-88.58
  Top1 w15: U2.3 460.6,72.6 v1(479,91) 479,126 457.6,147.4 U2.1
  Top1 w20: USB1.A4@304.21,94.58 362.42,94.58 384.4,72.6 U2.3
  Bottom2 w15: v1(479,91) 544.5,156.5 668.5,156.5 790,278 P2.12
VCC_3V3: 1.2 1.4 C1.2 C2.2 C11.2 P2.5 P2.11 P3.17 R2.1 R9.1 R10.2 R11.2 R12.1 R13.2 R17.2 U2.5 U3.1 U3.2 U3.3 U3.4 U5.1 U5.2 U5.3 U5.4 | length 5670.4
  Top1 w6: R12.1 R9.1 470,180 502.6,147.4 U2.5 ; R17.2 750,45 C11.2 787.68,82.68 1.4
  Top1 w7: v3(340,-575) 357,-592 644.88,-592 665,-571.88 U3.4 U3.3 U3.2 U3.1 ; P2.11 931,401 v1(1166,401) ; U5.4 U5.4@1210,-548.88 ; U5.3 U5.3@1310,-548.88 ; U5.2 U5.2@1410,-548.88 ; U5.1 1510,-548.88 U5.2@1410,-548.88 ; U3.1 950,-545.81 v1(950,-284) 953,-284 955,-286 951.13,-286 950.13,-287 950.13,-541.88 957.13,-548.88 U5.4@1210,-548.88 ; U3.1 977,-548.81 1309,-548.81 1410,-548.81 1509,-548.81 U5.2@1410,-548.88 ; U5.4@1210,-548.88 U5.3@1310,-548.88 ; U5.3@1310,-548.88 U5.2@1410,-548.88
  Top1 w15: U2.5 542.35,145 595,145 C2.2 C1.2 650,140 680,110 ; R17.2 705,45 ; P2.11 722,192 ; 1.2 836.2,137.8 782,192 722,192 ; R2.1 1267,-243 1137,-243 v1(1114,-220) 1095,-201 790,-201 745,-156 R10.2 R11.2 R13.2 716,-60 705,-49 705,45 ; 680,110 680,150 722,192 ; 680,110 680,70 705,45
  Bottom2 w7: P3.17 290,-525 v3(340,-575) ; v1(950,-284) 1019.5,-214.5 1087.08,-214.5 1092.58,-220 v1(1114,-220) ; v1(1166,401) 1180.5,415.5 1434.5,415.5 P2.5
pads on no net: 1.1 1.13 A1. U1.1 U1.2 U1.6 U1.10 U1.11 U1.12 U1.13 U1.14 U1.15 U1.16 U1.17 U1.18 U1.19 U1.20 U1.21 U1.22 U1.23 U1.27 U4.26 U4.44 U4.45 U4.47 U4.48 USB1.0 USB1.A8 USB1.B8

## Polygon pours and split planes (outlines as drawn)
GND on Bottom2 "GND_L02_P001" (solid, remove dead copper, pour order 1): -21.12,449.13 -21.12,-1074.96 2098.88,-1075 2098.88,449.13
GND on Top1 "GND_L01_P000" (solid, remove dead copper, pour order 0): -20,460 -20,-1076.03 2080,-1076.03 2100,460

## Keep-outs
Keep-Out Layer:
  the board outline again, w10

## Other copper
Top1:
  pour cut-out: 1890,210 1890,-215 2115,-215 2115,210
Bottom2:
  pour cut-out: 1890,210 1890,-215 2115,-215 2115,210

## Silkscreen, mask and mechanical layers (free items; w line width, h text height)
Top Overlay:
  region: 325,157.5 325,187.5 355,172.5
Bottom Overlay:
  lines w10: 1607.84,-69.84 1607.84,55.16
  text "5V" at 844.24,367.98 h40
  text "3V3" at 944.24,367.98 h40
  text "0" at 1044.24,367.98 h40
  text "2" at 1144.24,367.98 h40
  text "5" at 1244.24,367.98 h40
  text "12" at 1344.24,367.98 h40
  text "34" at 1444.24,367.98 h40
  text "35" at 1544.24,367.98 h40
  text "SensVN" at 1659.09,367.98 h40
  text "38" at 1744.24,367.98 h40
  text "37" at 1844.24,367.98 h40
  text "SensVP" at 1959.09,367.98 h40
  text "OLED" at 1612.58,232.01 h40
  text "GND" at 120.91,-368.98 h40 r180
  text "GND" at 235.76,-368.98 h40 r180
  text "4" at 335.76,-368.98 h40 r180
  text "13" at 420.91,-368.98 h40 r180
  text "14" at 535.76,-368.98 h40 r180
  text "15" at 635.76,-368.98 h40 r180
  text "27" at 735.76,-368.98 h40 r180
  text "32" at 835.76,-368.98 h40 r180
  text "33" at 935.76,-368.98 h40 r180
  text "9" at 1035.76,-368.98 h40 r180
  text "10" at 1135.76,-368.98 h40 r180
  text "18" at 1235.76,-368.98 h40 r180
  text "19" at 1335.76,-368.98 h40 r180
  text "21" at 1435.76,-368.98 h40 r180
  text "22" at 1535.76,-368.98 h40 r180
  text "23" at 1635.76,-368.98 h40 r180
  text "25" at 1735.76,-368.98 h40 r180
  text "26" at 1835.76,-368.98 h40 r180
Top Solder:
  rectangle: 1890,-215 2115,210
  text "KEY" at 118.18,236.99 h40
  text "RST" at 661.65,236.99 h40
Bottom Solder:
  rectangle: 1890,-215 2115,210
Mechanical 1:
  lines w10: 0,-360 0,360 cw(c70,360) 70,430 2010,430 cw(c2010,360) 2080,360 2080,-1015 2019,-1076

## Text inside footprints (layer, text, board x,y; h text height)
U3: Top Overlay "1" at 985,-482.08 h38.61 r180; Top Overlay "2" at 885,-482.88 h38.61 r180; Top Overlay "3" at 785,-482.88 h38.61 r180; Top Overlay "4" at 685,-482.08 h38.61 r180
U5: Top Overlay "1" at 1530,-482.89 h38.61 r180; Top Overlay "2" at 1430,-483.69 h38.61 r180; Top Overlay "3" at 1330,-483.69 h38.61 r180; Top Overlay "4" at 1230,-482.89 h38.61 r180